# EAGLE board rcp2fpc_v3 (EAGLE 9.0.0)
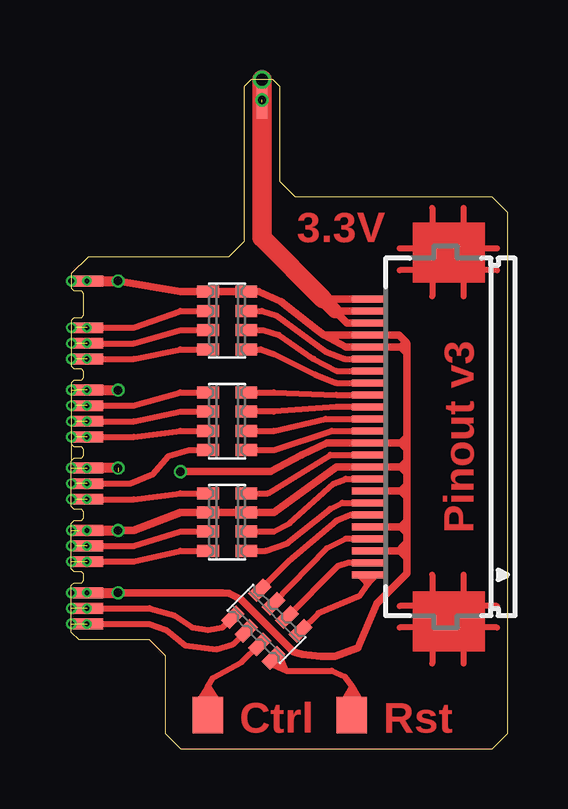
[diagram p0: board, top side]
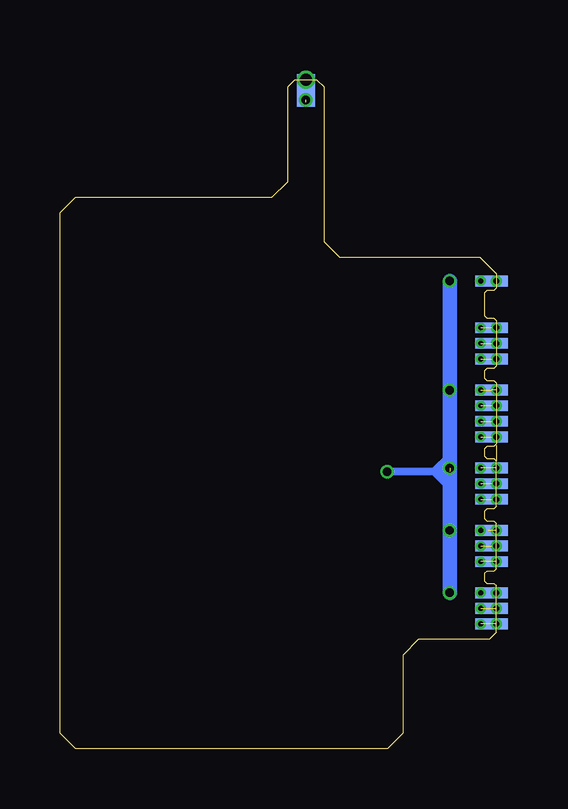
[diagram p1: board, bottom side, seen from below]

Size 18.2 x 27.9 mm. Coordinates in mm from the lower left corner, seen from the top.
Outline: 0,12 0.1,12.1 0.4,12.1 0.5,12.2 0.5,12.5 0.4,12.6 0.1,12.6 0,12.7 0,15.25 0.1,15.35 0.4,15.35 0.5,15.45 0.5,15.75 0.4,15.85 0.1,15.85 0,15.95 0,17.85 0.1,17.95 0.4,17.95 0.5,18.05 0.5,19 0.4,19.1 0.1,19.1 0,19.2 0,19.8 0.7,20.5 6.55,20.5 7.2,21.15 7.2,27.6 7.5,27.9 8.4,27.9 8.7,27.6 8.7,23.65 9.35,23 17.55,23 18.2,22.35 18.2,0.65 17.55,0 4.55,0 3.9,0.65 3.9,3.9 3.25,4.55 0.3,4.55 0,4.85 0,6.8 0.1,6.9 0.4,6.9 0.5,7 0.5,7.3 0.4,7.4 0.1,7.4 0,7.5 0,9.4 0.1,9.5 0.4,9.5 0.5,9.6 0.5,9.9 0.4,10 0.1,10 0,10.1 0,12
Outline: 0,12.65 0,12
Copper layers (1*16): Top 0.018mm / dielectric 1.55mm / Bottom 0.018mm
Design rules "Multi-CB_2L_100um-Tracks_OL35um": minimum track width 0.1mm, minimum drill 0.2mm, track to track 0.1mm, track to pad 0.1mm, pad to pad 0.1mm, via to via 0.1mm, smd to smd 0mil, copper to edge 0.2mm, drill to drill 0.2mm, minimum pad ring 0.125mm, minimum via ring 0.1mm, stop-mask expansion 2mil, vias tented up to drill 0.45mm, thermal gap 0.2mm

## Footprints (pad centres in the part's own frame; a part is rotated, then mirrored left to right if it is on the bottom)
CTS742C083 = smd 0.5 x 0.9: 1 -1.2,-0.8; 2 -0.4,-0.8; 3 0.4,-0.8; 4 1.2,-0.8; 5 1.2,0.8; 6 0.4,0.8; 7 -0.4,0.8; 8 -1.2,0.8
SMD0.8SQ = smd 1.27 x 1.524: P$1 0,0
FH12-24S-0.5SH = smd 0.3 x 1.3: 1 -5.75,3.25; 2 -5.25,3.25; 3 -4.75,3.25; 4 -4.25,3.25; 5 -3.75,3.25; 6 -3.25,3.25; 7 -2.75,3.25; 8 -2.25,3.25; 9 -1.75,3.25; 10 -1.25,3.25; 11 -0.75,3.25; 12 -0.25,3.25; 13 0.25,3.25; 14 0.75,3.25; 15 1.25,3.25; 16 1.75,3.25; 17 2.25,3.25; 18 2.75,3.25; 19 3.25,3.25; 20 3.75,3.25; 21 4.25,3.25; 22 4.75,3.25; 23 5.25,3.25; 24 5.75,3.25
SMD0,45-1,35 = smd 1.35 x 0.45: P$1 0,0

## Placement (x,y rotation side)
E$1  [CTS742C083]  8.14,5.2 135 top
E$2  [SMD0.8SQ]  5.7,1.4 0 top
E$3  [CTS742C083]  6.5,17.85 270 top
E$4  [CTS742C083]  6.5,13.65 270 top
E$5  [CTS742C083]  6.5,9.45 270 top
E$6  [SMD0.8SQ]  11.7,1.4 0 top
E$7  [FH12-24S-0.5SH]  15.6,13 90 top
E$8  [SMD0,45-1,35]  0.65,8.45 0 top
E$9  [SMD0,45-1,35]  0.65,9.1 0 top
E$10  [SMD0,45-1,35]  0.65,10.4 0 top
E$11  [SMD0,45-1,35]  0.65,11.05 0 top
E$12  [SMD0,45-1,35]  0.65,11.7 0 top
E$13  [SMD0,45-1,35]  0.65,13 0 top
E$14  [SMD0,45-1,35]  0.65,13.65 0 top
E$15  [SMD0,45-1,35]  0.65,14.3 0 top
E$16  [SMD0,45-1,35]  0.65,14.95 0 top
E$17  [SMD0,45-1,35]  0.65,16.25 0 top
E$18  [SMD0,45-1,35]  0.65,16.9 0 top
E$19  [SMD0,45-1,35]  0.65,17.55 0 top
E$22  [SMD0,45-1,35]  0.2,17.55 0 bottom
E$23  [SMD0,45-1,35]  0.2,16.9 0 bottom
E$24  [SMD0,45-1,35]  0.2,16.25 0 bottom
E$25  [SMD0,45-1,35]  0.2,14.95 0 bottom
E$26  [SMD0,45-1,35]  0.2,14.3 0 bottom
E$27  [SMD0,45-1,35]  0.2,13.65 0 bottom
E$28  [SMD0,45-1,35]  0.2,13 0 bottom
E$29  [SMD0,45-1,35]  0.2,11.7 0 bottom
E$30  [SMD0,45-1,35]  0.2,11.05 0 bottom
E$31  [SMD0,45-1,35]  0.2,10.4 0 bottom
E$32  [SMD0,45-1,35]  0.2,9.1 0 bottom
E$33  [SMD0,45-1,35]  0.2,8.45 0 bottom
E$34  [SMD0,45-1,35]  7.95,26.95 90 top
E$35  [SMD0,45-1,35]  7.8,27.45 90 bottom
E$37  [SMD0,45-1,35]  8.1,27.45 90 bottom
E$38  [SMD0,45-1,35]  0.65,7.8 0 top
E$40  [SMD0,45-1,35]  0.65,5.85 0 top
E$41  [SMD0,45-1,35]  0.65,5.2 0 top
E$42  [SMD0,45-1,35]  0.2,7.8 0 bottom
E$43  [SMD0,45-1,35]  0.2,6.5 0 bottom
E$44  [SMD0,45-1,35]  0.2,5.85 0 bottom
E$45  [SMD0,45-1,35]  0.2,5.2 0 bottom
E$46  [SMD0,45-1,35]  0.65,19.5 0 top
E$47  [SMD0,45-1,35]  0.2,19.5 0 bottom
GND  [SMD0,45-1,35]  0.65,6.5 0 top

## Library data of the parts
E$1 E$3-E$5 = resistor-net
E$2 E$6 E$8-E$19 E$22-E$35 E$37 E$38 E$40-E$47 GND = wirepad
E$7 = con-hirose

## Nets
3V3: E$7.22 E$7.23 E$7.24 E$34.P$1 E$35.P$1
#DSYNC: E$5.1 E$10.P$1 E$31.P$1
#DSYNC.1: E$5.8 E$7.11
CTRL: E$1.7 E$2.P$1
CTRL.1: E$1.2 E$7.2
D0: E$3.2 E$19.P$1 E$22.P$1
D0.1: E$3.7 E$7.19
D1: E$3.3 E$18.P$1 E$23.P$1
D1.1: E$3.6 E$7.18
D2: E$3.4 E$17.P$1 E$24.P$1
D2.1: E$3.5 E$7.17
D3: E$4.1 E$15.P$1 E$26.P$1
D3.1: E$4.8 E$7.16
D4: E$4.2 E$14.P$1 E$27.P$1
D4.1: E$4.7 E$7.15
D5: E$4.3 E$13.P$1 E$28.P$1
D5.1: E$4.6 E$7.14
D6: E$4.4 E$11.P$1 E$30.P$1
D6.1: E$4.5 E$7.13
GND: E$3.1 E$3.8 E$5.2 E$5.7 E$7.3 E$7.5 E$7.8 E$7.10 E$7.12 E$7.20 E$7.21 E$9.P$1 E$12.P$1 E$16.P$1 E$25.P$1 E$29.P$1 E$32.P$1 E$46.P$1
LRCLK: E$5.4 E$38.P$1
LRCLK.1: E$5.5 E$7.7
RST: E$1.8 E$6.P$1
RST.1: E$1.1 E$7.1
SCLK: E$1.6 E$41.P$1
SCLK.1: E$1.3 E$7.4
SDATA: E$1.5 E$40.P$1
SDATA.1: E$1.4 E$7.6
VCLK: E$5.3 E$8.P$1 E$33.P$1
VCLK.1: E$5.6 E$7.9

## Tracks (layer width: path | path; a pad name or v marks a point on that pad's centre or on a via)
3V3  (via drill 0.35, 0.5)  (1 unrouted)
  Top 0.152: E$34.P$1 7.95,27.3
  Top 0.305: E$7.22 11.5,17.75 11,18.25 E$7.23 | E$7.24 10.5,18.75
  Top 0.61: 11,18.25 10.5,18.75
  Top 0.762: 10.5,18.75 7.95,21.3
  Top 0.813: 7.95,21.3 7.95,27.3 v7.95,27.9
  Bottom 0.152: E$35.P$1 7.8,27.2 v7.95,27.05
#DSYNC  (via drill 0.2)  (1 unrouted)
  Top 0.254: E$10.P$1 2.6,10.4 4.55,10.65 E$5.1
  other vias: 0.65,10.4
#DSYNC1  (via drill 0.25)
  other vias: 0,10.4
#DSYNC.1
  Top 0.254: E$5.8 8.2,10.65 10.8,12.25 E$7.11
A_LRCLK  (via drill 0.2, 0.25)  (1 unrouted)
  other vias: 0.65,7.8 0,7.8
A_SCLK  (via drill 0.2, 0.25)  (1 unrouted)
  other vias: 0.65,5.2 0,5.2
A_SDATA  (via drill 0.2, 0.25)  (1 unrouted)
  other vias: 0,5.85 0.65,5.85
CTRL
  Top 0.254: E$2.P$1 5.7,2.6 | 5.7,2.6 5.2,1.8 | 5.7,2.6 6.2,1.8 | 5.7,2.6 5.9,2.95 7.1,3.6 E$1.7
CTRL.1
  Top 0.254: E$7.2 11.55,7.75 11.1,7.6 E$1.2
D0  (via drill 0.2)  (1 unrouted)
  Top 0.254: E$19.P$1 2.6,17.55 4.55,18.25 E$3.2
  other vias: 0.65,17.55
D0.1
  Top 0.254: E$3.7 7.95,18.25 8.55,18.05 10.6,16.55 11.4,16.25 E$7.19
D1  (via drill 0.2)  (1 unrouted)
  Top 0.254: E$18.P$1 2.6,16.9 4.55,17.45 E$3.3
  other vias: 0.65,16.9
D1.1
  Top 0.254: E$3.6 8,17.45 8.65,17.25 10.1,16.25 11.05,15.75 E$7.18
D2  (via drill 0.2)  (1 unrouted)
  Top 0.254: E$17.P$1 2.6,16.25 4.55,16.65 E$3.4
  other vias: 0.65,16.25
D2.1
  Top 0.254: E$3.5 7.9,16.65 8.45,16.45 10.15,15.6 11.05,15.25 E$7.17
D3  (via drill 0.2)  (1 unrouted)
  Top 0.254: E$15.P$1 2.6,14.3 4.55,14.85 E$4.1
  other vias: 0.65,14.3
D3.1
  Top 0.254: E$4.8 8.45,14.85 11.05,14.75 E$7.16
D4  (via drill 0.2)  (1 unrouted)
  Top 0.254: E$14.P$1 2.6,13.65 4.55,14.05 E$4.2
  other vias: 0.65,13.65
D4.1
  Top 0.254: E$7.15 11.05,14.25 8.45,14.05 E$4.7
D5  (via drill 0.2)  (1 unrouted)
  Top 0.254: E$13.P$1 2.6,13 4.55,13.25 E$4.3
  other vias: 0.65,13
D5.1
  Top 0.254: E$4.6 8.45,13.25 10.6,13.75 E$7.14
D6  (via drill 0.2)  (1 unrouted)
  Top 0.254: E$11.P$1 2.45,11.05 3.4,11.45 4.05,12.2 4.9,12.45 E$4.4
  other vias: 0.65,11.05
D6.1
  Top 0.254: E$4.5 8.45,12.45 10.85,13.25 E$7.13
D7  (via drill 0.25)
  other vias: 0,11.05
D8  (via drill 0.25)
  other vias: 0,13
D9  (via drill 0.25)
  other vias: 0,13.65
D10  (via drill 0.25)
  other vias: 0,14.3
D11  (via drill 0.25)
  other vias: 0,16.9
D12  (via drill 0.25)
  other vias: 0,16.25
D13  (via drill 0.25)
  other vias: 0,17.55
GND  (via drill 0.2, 0.25, 0.35)  (7 unrouted)
  Top 0.254: v0.65,6.5 v0,6.5 | 0.33,9.1 E$9.P$1 | 12.4,11.75 E$7.10 | E$7.8 12.3,10.75 | E$7.5 12.4,9.25 | E$46.P$1 0.33,19.5
  Top 0.305: E$7.10 11.05,11.75 8.45,9.85 E$5.7 E$5.2 4.55,9.85 2.6,9.1 v1.95,9.1 | v1.95,19.5 4.55,19.05 E$3.1 E$3.8 7.8,19.05 8.75,18.65 10.2,17.5 10.54,17.24 | 10.54,17.24 11.45,16.75 E$7.20 13.75,16.75 | 10.54,17.24 E$7.21 13.65,17.25 13.95,16.95 | v4.55,11.55 8.3,11.55 9.6,12.25 10.67,12.74 10.7,12.75 E$7.12 14,12.75 | 14,8.6 14,9 | 14,9 14,9.25 | 14,9.25 14,9.5 | 14,9.5 14,10.5 | 14,13 14,16.5 | 14,16.5 14,16.75 | 14,16.75 14,16.9 13.95,16.95 | 13.75,16.75 14,16.75 | 14,11.75 12.4,11.75 | 12.3,10.75 14,10.75 | 12.4,9.25 13.75,9.25 | 13.75,9.25 14,9.25 | 14,9 13.75,9.25 | 13.75,9.25 14,9.5 | 14,11.5 13.75,11.75 14,12 | 14,10.5 13.75,10.75 14,11 | 14,10.5 14,10.75 | 14,10.75 14,11.5 | 14,12.75 14,11.75 | 14,11.75 14,11.5 | 14,12.5 13.75,12.75 14,13 | 14,13 14,12.75 | 14,16.5 13.75,16.75 | 13.75,16.75 13.95,16.95 | v1.95,6.5 6.3,6.5 6.57,6.48 7.08,6.23 9.27,4.03 9.62,3.93 10.4,3.85 11,3.85 11.95,4.2 12.75,6.05 14,7.3 14,8.45 | 14,8.45 14,8.6 | 13.95,8 13.7,8.25 13.65,8.25 | 14,8.6 13.85,8.45 | 13.65,8.25 E$7.3 | 13.65,8.25 13.85,8.45 | 13.85,8.45 14,8.45
  Top 0.406: E$16.P$1 v1.95,14.95 | v0.65,6.5 v1.95,6.5 | v1.95,11.7 E$12.P$1 | E$46.P$1 v1.95,19.5 | E$9.P$1 v1.95,9.1
  Bottom 0.305: v4.55,11.55 2.6,11.55 | 2.6,11.55 1.95,11.55 | 2.6,11.55 1.95,12.2 | 2.6,11.55 1.95,10.9
  Bottom 0.61: v1.95,6.5 1.95,10.9 1.95,11.55 1.95,12.2 v1.95,14.95 v1.95,19.5
  other vias: 0.65,14.95 0.65,11.7 0.65,9.1 0,19.5 0.65,19.5 0,14.95 0,11.7 0,9.1
LRCLK
  Top 0.254: E$38.P$1 2.6,7.8 4.55,8.25 E$5.4
LRCLK.1
  Top 0.254: E$5.5 8.1,8.25 9,8.55 10.8,10 11.3,10.25 E$7.7
RST
  Top 0.254: 11.7,2.6 E$6.P$1 | 11.7,2.6 12.2,1.75 | 11.7,2.6 11.2,1.75 | E$1.8 8.95,3.25 | 8.95,3.25 10.85,3.25 11.4,3 11.7,2.6 | 8.95,3.25 8.25,3.55 | 8.95,3.25 8.65,3.95
RST.1
  Top 0.254: E$7.1 12.35,6.85 | 12.35,6.85 12,6.35 10.3,5.65 E$1.1 | 12.35,6.85 12.7,7.25 | 12.35,6.85 12,7.25
S$1
  Top 0.254: 17.75,20.85 16.35,20.85 | 16.35,20.85 15.05,20.85 | 15.05,20.85 13.7,20.85 | 15.05,20.85 15.05,18.85 | 16.35,20.85 16.35,18.85 | 15.05,22.55 15.05,20.85 | 16.35,22.55 16.35,20.85
S$2
  Top 0.254: 17.75,19.95 13.7,19.95
S$3
  Top 0.254: 17.75,5.95 16.35,5.95 | 16.35,5.95 15.05,5.95 | 15.05,5.95 13.7,5.95 | 15.05,5.95 15.05,3.55 | 16.35,5.95 16.35,3.55 | 15.05,7.25 15.05,5.95 | 16.35,7.25 16.35,5.95
S$4
  Top 0.254: 17.75,5.05 13.7,5.05
SCLK
  Top 0.254: E$1.6 6.75,4.35 6.05,4.15 4.75,4.3 3.95,4.95 3.25,5.2 E$41.P$1
SCLK.1
  Top 0.254: E$7.4 11.45,8.75 10.65,8.35 E$1.3
SDATA
  Top 0.254: E$40.P$1 3.25,5.85 4.3,5.55 5.05,5.05 5.7,4.95 6.3,5.05 E$1.5
SDATA.1
  Top 0.254: E$7.6 11.65,9.75 11.05,9.5 9.05,7.8 E$1.4
VCLK  (via drill 0.2)  (1 unrouted)
  Top 0.254: E$8.P$1 2.6,8.45 4.55,9.05 E$5.3
  other vias: 0.65,8.45
VCLK1  (via drill 0.25)
  other vias: 0,8.45
VCLK.1
  Top 0.254: E$5.6 8.45,9.05 9.1,9.4 10.95,11.05 11.45,11.25 E$7.9

## Text on the board
Top: 3.3V | Pinout v3 | Ctrl | Rst